# Altium PCB TG21_Slave_Device_Amply.PcbDoc
Units mm, origin at the board's own origin, x right, y up, seen from the top; angles counter-clockwise.
Board outline 90.02 x 69.98 mm, 2 copper layers (Top Layer, Bottom Layer), stack 1.571 mm thick; 72 components, 42 nets, 207 pads, 195 vias.
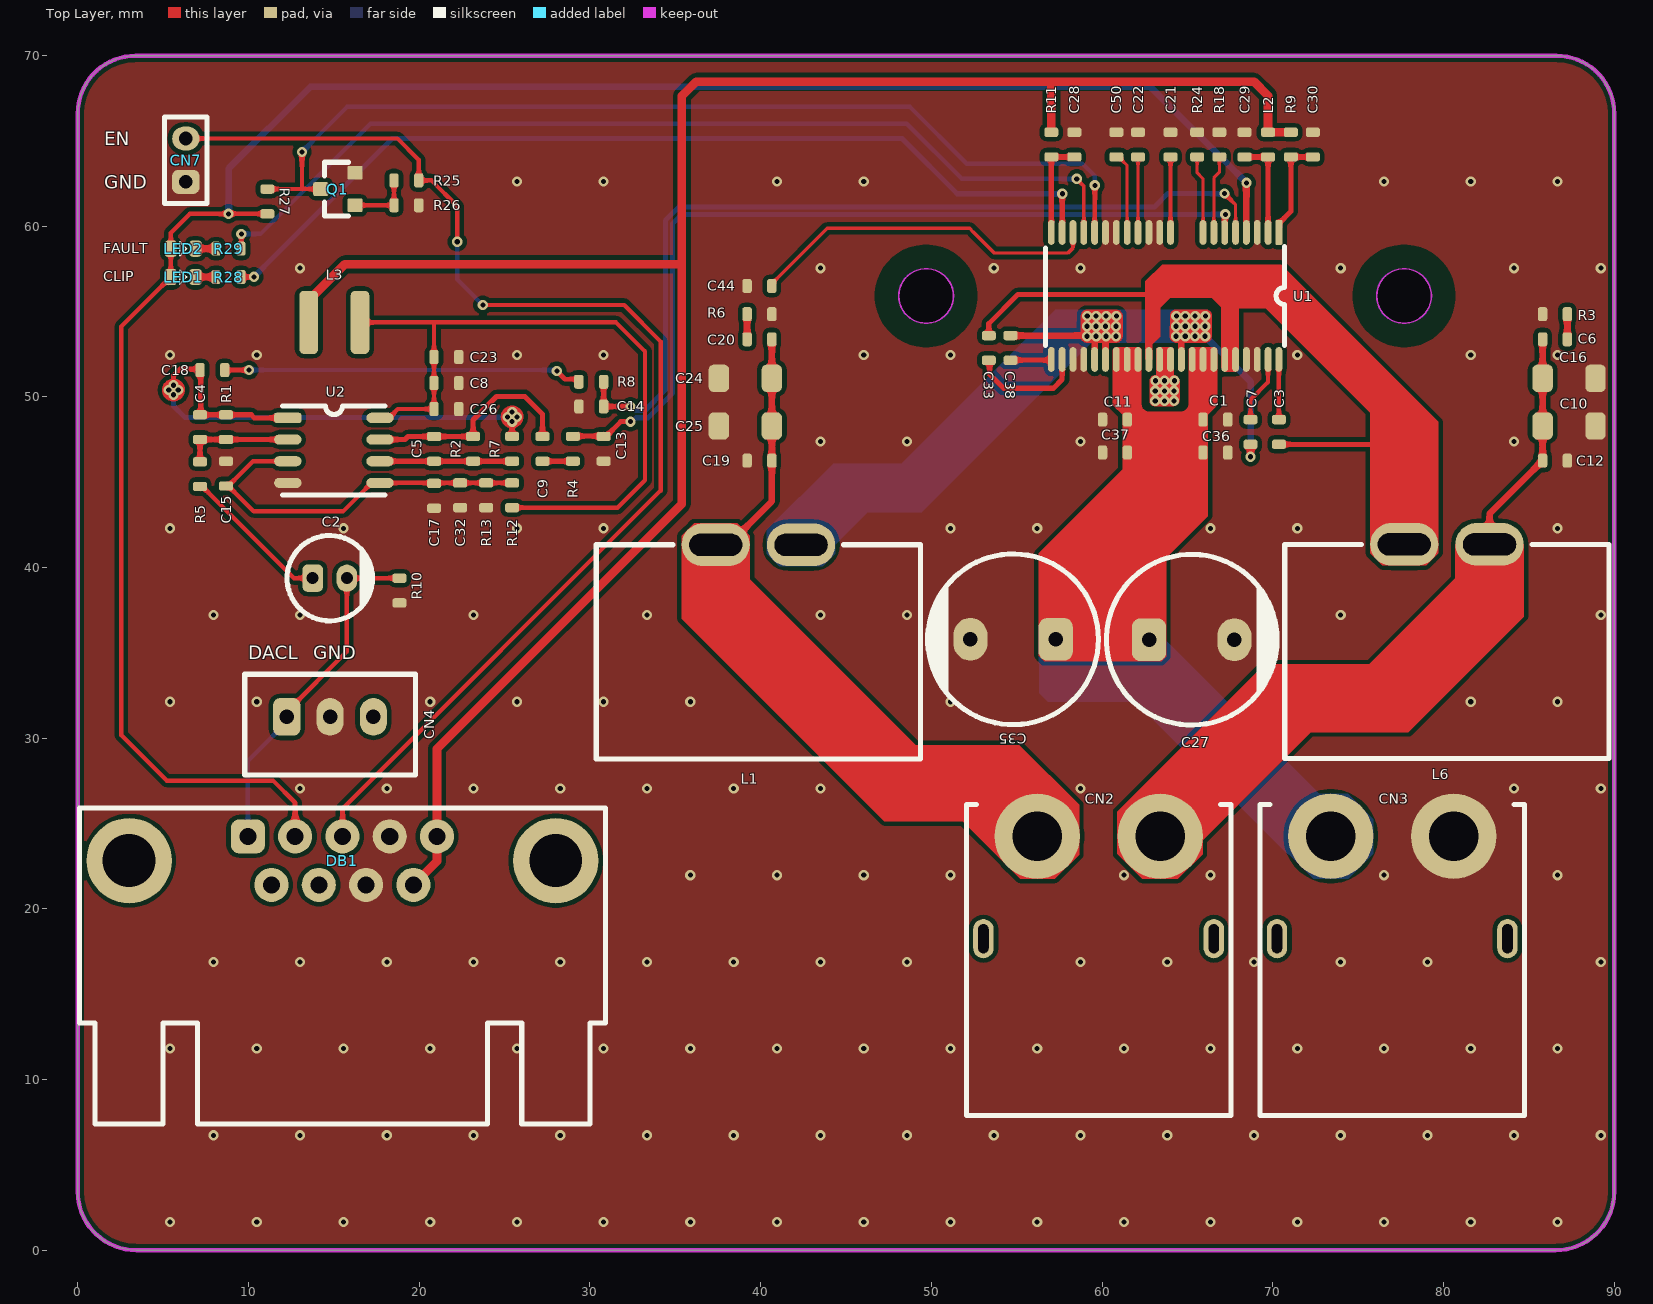
[diagram p0: Top Layer view]
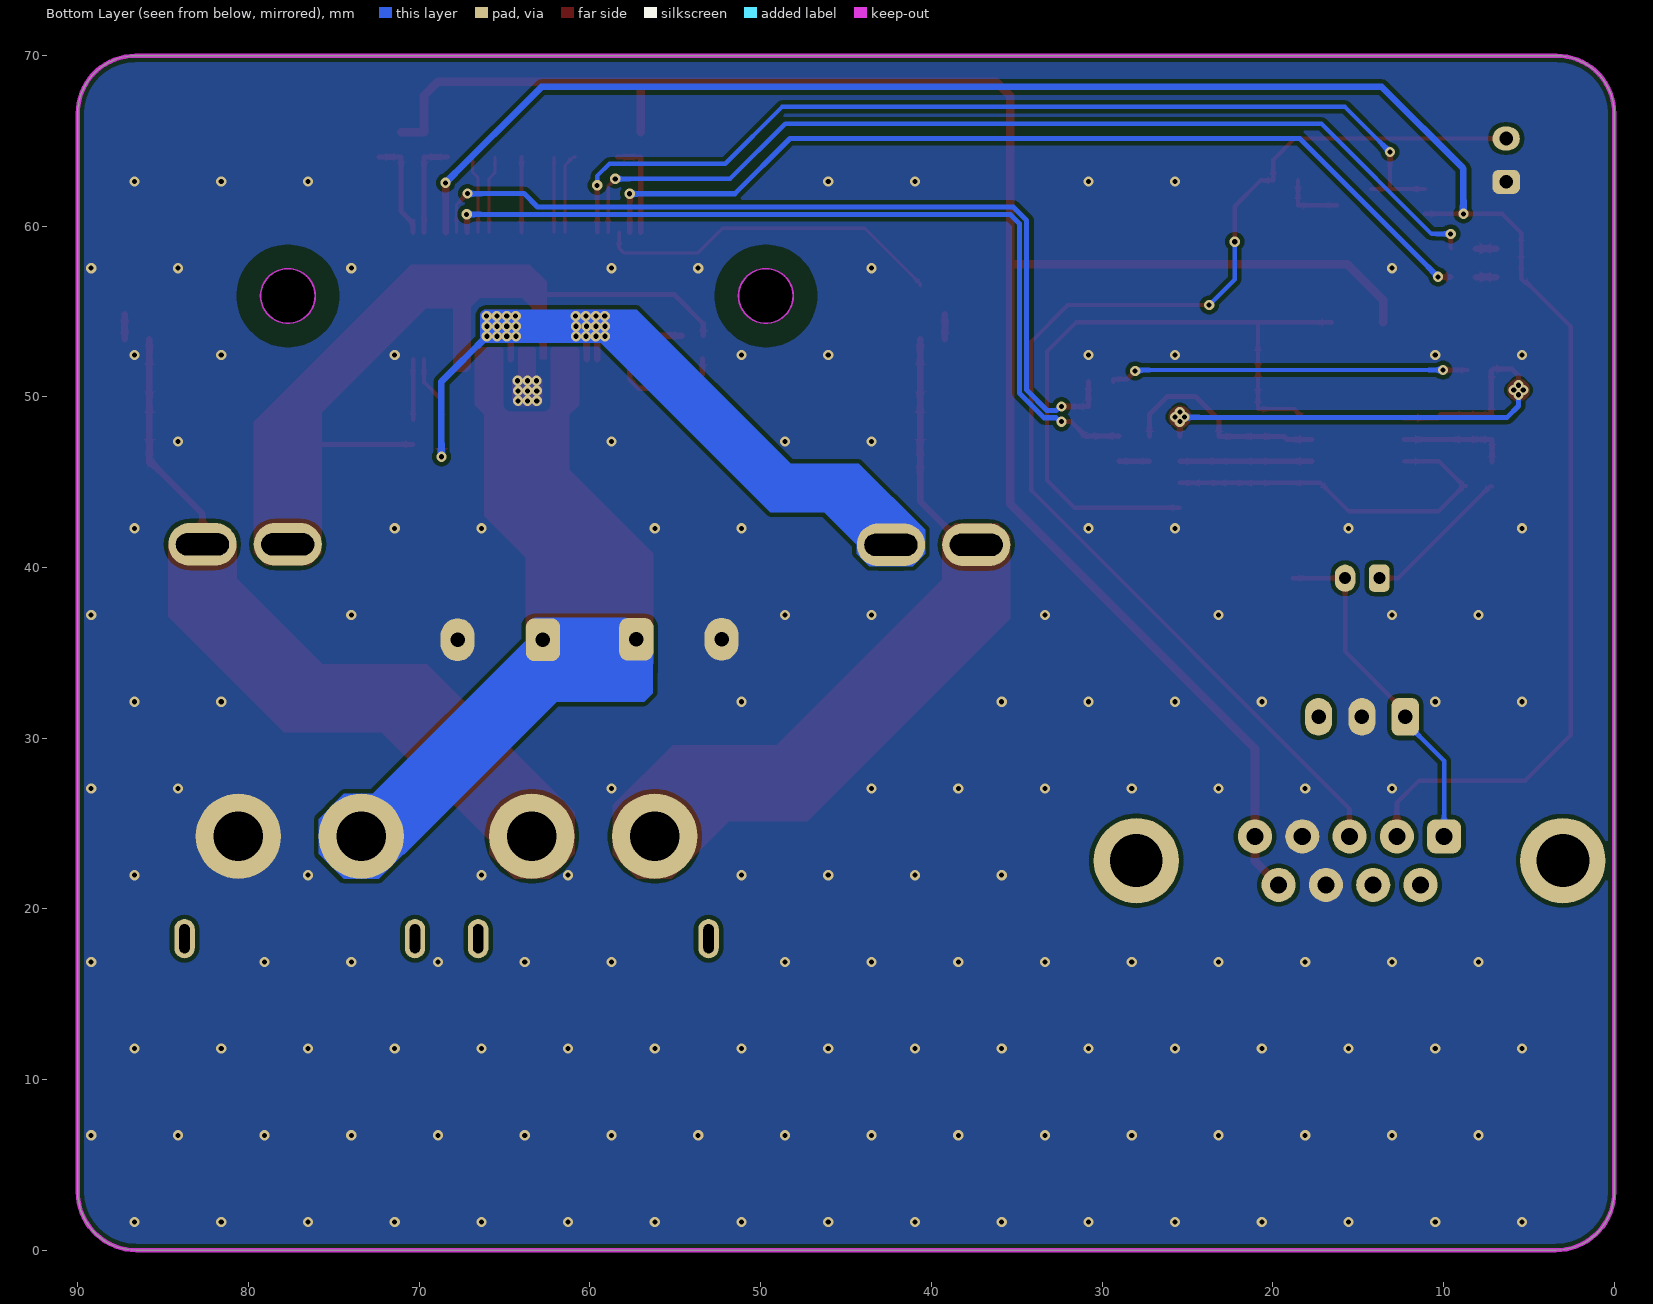
[diagram p1: Bottom Layer view, seen from below]
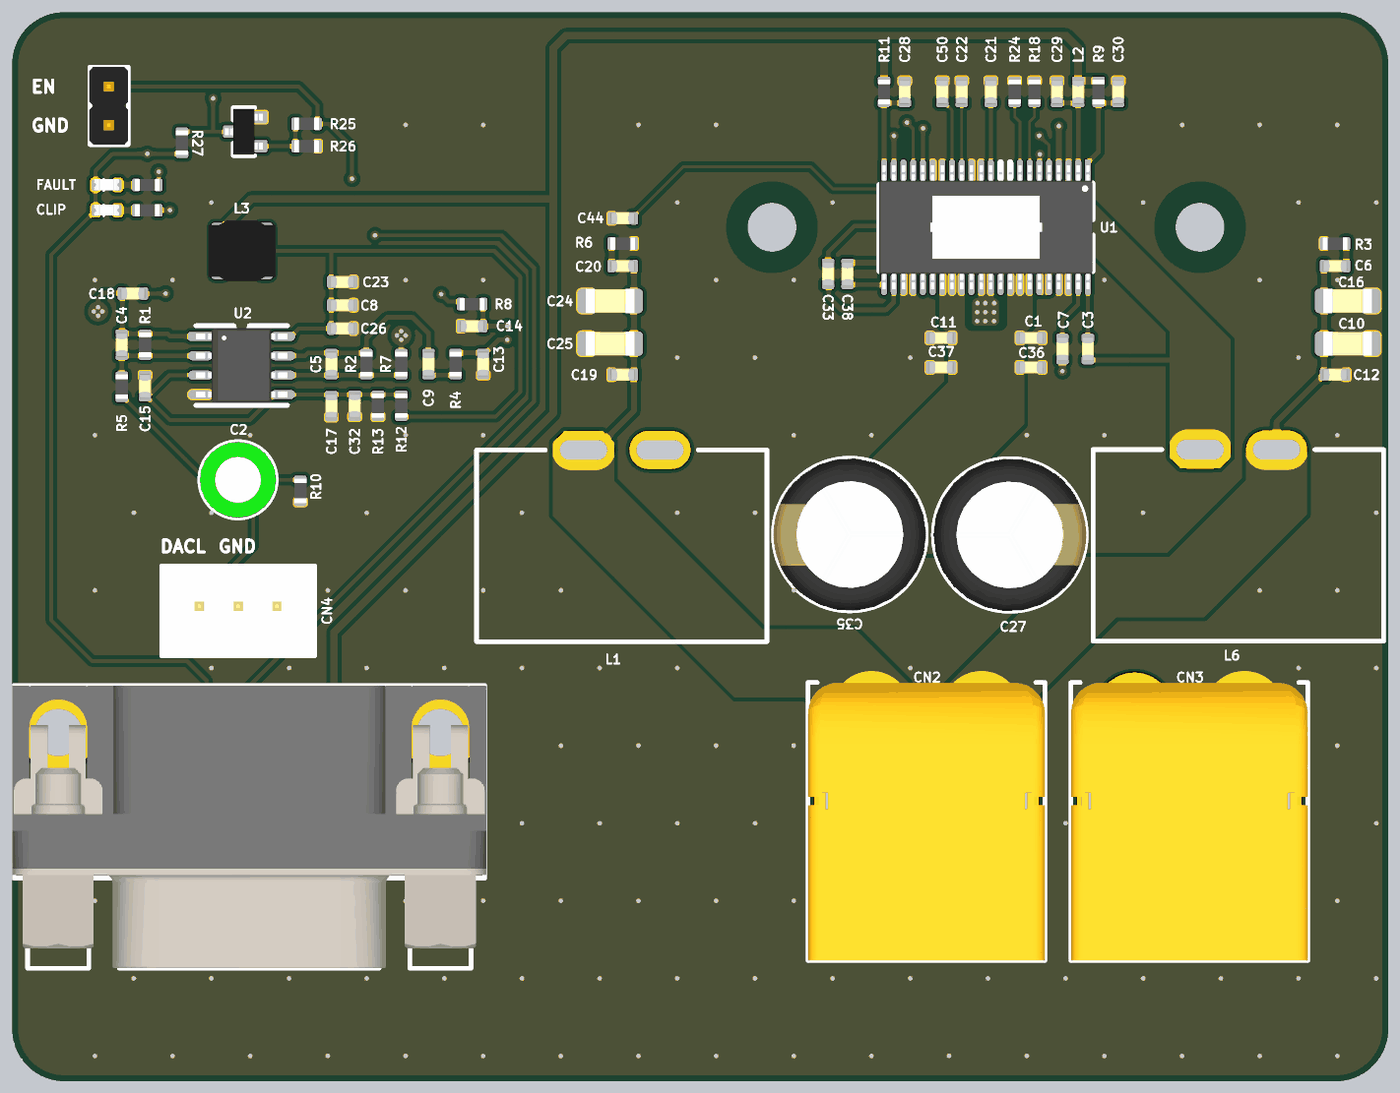
[diagram p2: 3D render of the assembled board from above, using the file's embedded part models]

## Layer stack, top to bottom
Top Solder: solder mask 0.0102, Solder Resist, Dk 3.5
Top Layer: signal copper 0.0356
Dielectric 1: dielectric 1.5, FR-4, Dk 4.8
Bottom Layer: signal copper 0.0356
Bottom Solder: solder mask 0.0102, Solder Resist, Dk 3.5

## Board outline
-0.009,3.429 -0.009,66.587 cw(c3.381,66.587) 3.381,69.977 86.619,69.977 cw(c86.619,66.587) 90.009,66.587 90.009,3.429 cw(c86.58,3.429) 86.58,0 3.42,0 cw(c3.42,3.429)
cut-out: 77.694,54.305 cw(c77.694,55.905) 76.094,55.905 cw(c77.694,55.905) 77.694,57.505 cw(c77.694,55.905) 79.294,55.905 cw(c77.694,55.905)
cut-out: 49.694,54.305 cw(c49.694,55.905) 48.094,55.905 cw(c49.694,55.905) 49.694,57.505 cw(c49.694,55.905) 51.294,55.905 cw(c49.694,55.905)

## Design rules (kind name [scope] priority, off if disabled: settings)
BoardOutlineClearance [All] p1: gap=0.2 ignorepadtopadclearanceinfootprint=FALSE
Clearance [All] p1: gap=0.25 ignorepadtopadclearanceinfootprint=FALSE
ComponentClearance [All] p1: gap=0.127 collisioncheckmode=3 verticalgap=0.127 showdistances=TRUE
DiffPairsRouting [All] p1: maxlimit=0.254 minlimit=0.127 mostfreqgap=0.127 toplayer_minwidth=0.127 toplayer_maxwidth=25.4 toplayer_prefwidth=0.127 bottomlayer_minwidth=0.127 bottomlayer_maxwidth=25.4 bottomlayer_prefwidth=0.127 maxuncoupledlength=12.7
Height [All] p1: minheight=0 maxheight=1816.048 prefheight=12.7
HoleSize [All] p1: absolutevalues=TRUE maxlimit=6.3 minlimit=0.3 maxpercent=80.000 minpercent=20.000
HoleToHoleClearance [All] p1: gap=0.025 allowstackedmicrovias=FALSE
MinimumAnnularRing [All] p1: minimumring=0.076
MinimumSolderMaskSliver [All] p1: minsoldermaskwidth=0
PlaneClearance [All] p1: clearance=0.127
PlaneConnect PlaneConnectPowerPads [InPadClass('PowerPads')] p1: planeconnectstyle=Direct reliefexpansion=0.508 reliefentries=4 reliefconductorwidth=0.254 reliefairgap=0.254
PlaneConnect [All] p2: pad.planeconnectstyle=Relief pad.reliefexpansion=0.3 pad.reliefentries=4 pad.reliefconductorwidth=0.127 pad.reliefairgap=0.127 via.planeconnectstyle=Direct via.reliefexpansion=0.3 via.reliefentries=4 via.reliefconductorwidth=0.127 via.reliefairgap=0.127
PolygonConnect PolygonConnectPowerPads [All vs (InPadClass('PowerPads'))] p1: connectstyle=Direct reliefconductorwidth=0.254 reliefentries=4 polygonreliefangle="90 Angle" airgapwidth=0.254
PolygonConnect [All] p2: connectstyle=Direct reliefconductorwidth=0.127 reliefentries=4 polygonreliefangle="90 Angle" airgapwidth=0.127
RoutingVias [All] p1: holewidth=0.3 width=0.6 viastyle="Through Hole" minholewidth=0.3 minwidth=0.6 maxholewidth=0.6 maxwidth=6.6
SilkToSilkClearance [All] p1: silktosilkclearance=0
SilkToSolderMaskClearance [IsPad] p1: minsilkscreentomaskgap=0.025 clearancetoexposedcopper=TRUE
SolderMaskExpansion [All] p1: expansion=0.075 istentingtop=FALSE
Width [All] p1: maxlimit=25.4 minlimit=0.127 preferedwidth=0.127 minimp=50.000000 maximp=50.000000 favimp=50.000000
20 further rules are at their usual default settings.

## Classes and differential pairs
differential pair IN: +IN_P -IN_N

## Components (designator, comment, footprint, x,y, rotation, side; value= is the part's Value field where it differs from the comment)
C1 "1uF" CAP-0603#1 66.642,48.66 r180 top
C2 "10uF" PLUGIN,D5xL11mm 14.758,39.37 r0 top
C3 "33nF" CAP-0603#1 70.362,47.935 r90 top
C4 "22pF" CAP-0603#1 7.154,48.216 r270 top
C5 "22pF" CAP-0603#1 20.87,46.946 r270 top
C6 "10nF" CAP-0603#1 86.533,53.365 r0 top
C7 "33nF" CAP-0603#2 68.698,47.934 r90 top
C8 "100nF" CAP-0603#1 21.588,50.8 r0 top
C9 "10uF" CAP-0603#1 27.22,46.946 r90 top
C10 "470nF" "CAP-1206 - 1" 87.358,48.285 r0 top
C11 "1uF" CAP-0603#1 60.755,48.66 r180 top
C12 "1nF" CAP-0603#1 86.533,46.253 r0 top
C13 "100pF" CAP-0603#1 30.801,46.946 r270 top
C14 "100pF" CAP-0603#1 30.076,49.428 r0 top
C15 "100nF" CAP-0603#1 8.678,45.496 r90 top
C16 "470nF" "CAP-1206 - 1" 87.358,51.079 r0 top
C17 "100nF" CAP-0603#1 20.87,44.196 r270 top
C18 "10uF" CAP-0603#1 7.879,51.562 r180 top
C19 "1nF" CAP-0603#1 39.931,46.253 r0 top
C20 "10nF" CAP-0603#1 39.931,53.365 r0 top
C21 "1uF" CAP-0603#1 64.012,64.77 r90 top
C22 "1uF" CAP-0603#1 62.107,64.77 r90 top
C23 "10uF" CAP-0603#1 21.588,52.324 r0 top
C24 "470nF" "CAP-1206 - 1" 39.106,51.079 r0 top
C25 "470nF" "CAP-1206 - 1" 39.106,48.285 r0 top
C26 "10uF" CAP-0603#1 21.588,49.276 r0 top
C27 "470uF" Plugin,D10xL20mm 65.253,35.763 r0 top
C28 "100nF" CAP-0603#1 58.379,64.77 r90 top
C29 "100nF" CAP-0603#1 68.343,64.77 r90 top
C30 "100nF" CAP-0603#1 72.349,64.77 r90 top
C32 "10uF" CAP-0603#1 22.394,44.226 r270 top
C33 "33nF" CAP-0603#2 53.365,52.857 r270 top
C35 "470uF" Plugin,D10xL20mm 54.788,35.789 r180 top
C36 "1uF" CAP-0603#1 66.642,46.728 r180 top
C37 "1uF" CAP-0603#1 60.755,46.728 r180 top
C38 "33nF" CAP-0603#1 54.635,52.857 r270 top
C44 "100nF" CAP-0603#1 39.931,56.49 r0 top
C50 "1uF" CAP-0603#1 60.837,64.77 r90 top
CN2 "XT60PW-M" XT60PW-M 59.8,18.25 r180 top locked
CN3 "XT60PW-M" XT60PW-M 77,18.25 r180 top locked
CN4 "XH2.54-3P" Plugin,P=2.54mm,3P 14.774,31.242 r0 top
CN7 "PH2.54-2P" "Plugin,P=2.54mm,2P,Pin Headers" 6.325,63.856 r90 top
DB1 "DB9_Male_RightAngle" "D-Sub, 9P, Through Hole,Right Angle" 15.5,22.82 r180 top locked
L1 "10uH" RM6 39.867,41.326 r180 top
L2 "10uH" CAP-0603#1 69.727,64.77 r270 top
L3 "10uH" SMD,4x4x1.8mm(4018) 15.028,54.356 r0 top
L6 "10uH" RM6 80.202,41.351 r180 top
LED1 "YELLOW" LED-0603 6.167,57.013 r0 top
LED2 "YELLOW" LED-0603 6.167,58.674 r0 top
Q1 "HF" SOT-23 15.148,62.165 r180 top
R1 "10K" RES-0603 8.678,48.216 r90 top
R2 "10K" RES-0603 23.156,46.946 r90 top
R3 "3R3" RES-0603 86.533,54.839 r0 top
R4 "100R" RES-0603 28.998,46.946 r90 top
R5 "10K" RES-0603 7.154,45.466 r90 top
R6 "3R3" RES-0603 39.931,54.839 r0 top
R7 "10K" RES-0603 25.442,46.946 r270 top
R8 "100R" RES-0603 30.076,50.876 r0 top
R9 "0R" RES-0603 71.06,64.77 r270 top
R10 "100K" RES-0603 18.838,38.645 r270 top
R11 "0R" RES-0603 57.027,64.77 r270 top
R12 "10K" RES-0603 25.442,44.226 r270 top
R13 "10K" RES-0603 23.918,44.226 r90 top
R18 "22K" RES-0603 66.869,64.77 r270 top
R24 "30K" RES-0603 65.574,64.77 r270 top
R25 "1K" RES-0603 19.246,62.673 r180 top
R26 "10K" RES-0603 19.246,61.215 r180 top
R27 "10K" RES-0603 11.1,61.44 r270 top
R28 "1K" RES-0603 8.828,57.013 r0 top
R29 "1K" RES-0603 8.828,58.674 r0 top
U1 "TPA3255D2" HTSSOP-44-6.1mm-TPA3255 63.694,55.905 r270 top
U2 "NE5532" SOIC-8 15,46.856 r0 top

## Footprints (in the part's own frame and the unit in brackets; to place one, negate y for a bottom-side part, rotate by r counter-clockwise, add the part's x,y. Pads: shape width x height; smd on the part's side, far side on the other; paste and mask are expansions set on the pad)
CAP-0603#1 [mm]
  rrect50% 0.55x0.82 smd: 1(-0.725,0) 2(0.725,0)
  body extent -0.8,-0.4 0.8,0.4, height 0.8
CAP-0603#2 [mm]
  rrect50% 0.55x0.82 smd paste+0: 1(-0.725,0)
  rrect50% 0.55x0.82 smd: 2(0.725,0)
  body extent -0.8,-0.4 0.8,0.4, height 0.8
"CAP-1206 - 1" [mm]
  rrect50% 1.2x1.6 smd: 1(-1.55,0) 2(1.55,0)
  body extent -1.6,-0.8 1.6,0.8, height 1.25
"D-Sub, 9P, Through Hole,Right Angle" [mm]
  rrect50% 2x2 hole 1 mask+0.2: 1(5.54,-1.42)
  round 2 hole 1 mask+0.2: 2(2.77,-1.42) 3(0,-1.42) 4(-2.77,-1.42) 5(-5.54,-1.42) 6(4.155,1.42) 7(1.385,1.42) 8(-1.385,1.42) 9(-4.155,1.42)
  round 5 hole 3.1 mask+0.2: ""(-12.495,0) ""(12.495,0)
  silkscreen extent -15.4,-3.08 15.4,15.42, body extent -15.5,-3.08 15.5,15.42, height 12.5
HTSSOP-44-6.1mm-TPA3255 [mm]
  rrect25% 1.45x0.4 smd: 1(-3.72,6.667)
  oval 1.45x0.4 smd: 2(-3.72,6.032) 3(-3.72,5.397) 4(-3.72,4.762) 5(-3.72,4.127) 6(-3.72,3.492) 7(-3.72,2.857) 8(-3.72,2.222) 11(-3.72,0.317) 12(-3.72,-0.318) 13(-3.72,-0.953) 14(-3.72,-1.588) 15(-3.72,-2.223) 16(-3.72,-2.858) 17(-3.72,-3.493) 18(-3.72,-4.128) 19(-3.72,-4.763) 20(-3.72,-5.398) 21(-3.72,-6.033) 22(-3.72,-6.667) 23(3.72,-6.667) 24(3.72,-6.032) 25(3.72,-5.397) 26(3.72,-4.762) 27(3.72,-4.127) 28(3.72,-3.492) 29(3.72,-2.857) 30(3.72,-2.222) 31(3.72,-1.587) 32(3.72,-0.952) 33(3.72,-0.317) 34(3.72,0.318) 35(3.72,0.953) 36(3.72,1.588) 37(3.72,2.223) 38(3.72,2.858) 39(3.72,3.493) 40(3.72,4.128) 41(3.72,4.763) 42(3.72,5.398) 43(3.72,6.033) 44(3.72,6.667)
  oval 1.45x0.4 on Top Overlay: 9(-3.72,1.587) 10(-3.72,0.952)
  silkscreen extent -2.9,-7 2.9,7, body extent -4.05,-7 4.05,7, height 1.2
LED-0603 [mm]
  rrect50% 0.7x0.95 smd paste-0.1: 1(-0.725,0) 2(0.725,0)
  silkscreen extent -0.2,-0.41 0.2,0.4, body extent -0.82,-0.35 0.82,0.38, height 0.68
PLUGIN,D5xL11mm [mm]
  rrect50% 1.2x1.6 hole 0.7: 1(-1,0)
  oval 1.2x1.6 hole 0.7: 2(1,0)
  silkscreen extent -2.5,-2.5 2.5,2.5, body extent -2.5,-2.5 2.5,2.5, height 12
Plugin,D10xL20mm [mm]
  rrect50% 2x2.5 hole 0.85 mask+0.2: 1(-2.5,0)
  oval 2x2.5 hole 0.85 mask+0.2: 2(2.5,0)
  silkscreen extent -5,-5 5,5, body extent -5,-5 5,5, height 20
"Plugin,P=2.54mm,2P,Pin Headers" [mm]
  rrect50% 1.4x1.6 hole 0.8: 1(-1.27,0)
  oval 1.4x1.6 hole 0.8: 2(1.27,0)
  silkscreen extent -2.54,-1.25 2.54,1.25, body extent -2.54,-1.25 2.54,1.29, height 8.89
Plugin,P=2.54mm,3P [mm]
  rrect50% 1.6x2.2 hole 0.85 mask+0.1: 1(-2.54,0)
  oval 1.6x2.2 hole 0.85 mask+0.1: 2(0,0) 3(2.54,0)
  silkscreen extent -5,-3.4 5,2.5, body extent -5.04,-3.3 5.04,2.4, height 7
RES-0603 [mm]
  rrect50% 0.55x0.82 smd: 1(-0.725,0) 2(0.725,0)
  body extent -0.8,-0.4 0.8,0.4, height 0.45
RM6 [mm]
  oval 4x2.5 hole 1.3 slot 3.1 at 0 deg: 1(-2.5,0) 2(2.5,0)
  silkscreen extent -9.5,0 9.5,12.55
SMD,4x4x1.8mm(4018) [mm]
  rrect50% 1.1x3.7 smd: 1(-1.5,0) 2(1.5,0)
  body extent -2.2,-2 2.2,2, height 1.8
SOIC-8 [mm]
  rrect50% 1.6x0.6 smd: 1(-2.7,1.905)
  oval 1.6x0.6 smd: 2(-2.7,0.635) 3(-2.7,-0.635) 4(-2.7,-1.905) 5(2.7,-1.905) 6(2.7,-0.635) 7(2.7,0.635) 8(2.7,1.905)
  silkscreen extent -3,-2.61 3,2.61, body extent -3,-2.45 3,2.45, height 1.75
SOT-23 [mm]
  rrect25% 0.9x0.8 smd: 1(-1.085,0.95) 2(-1.085,-0.95) 3(0.915,0)
  silkscreen extent -0.7,-1.57 0.7,1.57, body extent -1.25,-1.5 1.25,1.5, height 1.1
XT60PW-M [mm]
  round 5 hole 2.9 mask+0.1: 1(3.6,-6) 2(-3.6,-6)
  oval 1.2x2.3 hole 0.6 slot 1.7 at 90 deg: ""(-6.75,0) ""(6.75,0)
  silkscreen extent -7.75,-7.85 7.75,10.35, body extent -7.75,-7.85 7.75,10.35, height 8.4

## Part data
C1 C11 C21 C22 C36 C37 C50: library part CC0603KRX7R9BB105, "1uF ±10% 50V Ceramic Capacitor X7R 0603", DigiKey Part Number=311-2082-2-ND, LCSC Part #=C559769, Manufacturer=YAGEO, Package=0603, ComponentLink1Description=Link, ComponentLink1URL=https://www.lcsc.com/product-detail/C559769.html?s_z=n_CC0603KRX7R9BB105, ComponentLink2Description="Link 1", ComponentLink2URL=https://www.digikey.com/en/products/detail/yageo/CC0603KRX7R9BB105/5883796?s=N4IgTCBcDaIMJwAwDZEGYDSAlAGgdiwE4AhYgRkQFYQBdAXyA, Mfr.Part #=CC0603KRX7R9BB105
C2: library part 50YXF10MEFC5X11, "10uF 50V Aluminum Electrolytic Capacitors Through Hole,D5xL11mm 5000hrs@105℃", DigiKey Part Number=1189-1852-ND, LCSC Part #=C88726, Manufacturer=Rubycon, Package="Through Hole,D5xL11mm", ComponentLink1Description=Link, ComponentLink1URL=https://www.lcsc.com/product-detail/C88726.html, ComponentLink2Description="Link 1", ComponentLink2URL=http://digikey.com/en/products/detail/rubycon/50YXF10MEFC5X11/3562878?s=N4IgTCBcDaIKwAYCaANAYgRgQWQKJoGE4UMMQBdAXyA, Mfr.Part #=50YXF10MEFC5X11
C3 C7 C33 C38: library part CC0603KRX7R9BB333, "33nF ±10% 50V Ceramic Capacitor X7R 0603", DigiKey Part Number=311-1429-2-ND, LCSC Part #=C106856, Manufacturer=YAGEO, Package=0603, ComponentLink1Description=Link, ComponentLink1URL=https://www.lcsc.com/product-detail/C106856.html?s_z=n_CC0603KRX7R9BB333, ComponentLink2Description="Link 1", ComponentLink2URL=https://www.digikey.com/en/products/detail/yageo/CC0603KRX7R9BB333/2833594?s=N4IgTCBcDaIMJwAwDZEGYDSAlAGgdiwE4AhYtckAXQF8g, Mfr.Part #=CC0603KRX7R9BB333
C4 C5: library part CC0603JRNPO9BN220, "22pF ±5% 50V Ceramic Capacitor NP0 0603", DigiKey Part Number=311-1062-2-ND, LCSC Part #=C105620, Manufacturer=YAGEO, Package=0603, ComponentLink1Description=Link, ComponentLink1URL=https://www.lcsc.com/product-detail/C105620.html?s_z=n_CC0603JRNPO9BN220, ComponentLink2Description="Link 1", ComponentLink2URL=https://www.digikey.com/en/products/detail/yageo/CC0603JRNPO9BN220/302796?s=N4IgTCBcDaIMJwAwDZEGYBSAlAcgBQHkBOAIRzDERAF0BfIA, Mfr.Part #=CC0603JRNPO9BN220
C6 C20: library part CC0603JRX7R9BB103, "10nF ±5% 50V Ceramic Capacitor X7R 0603", DigiKey Part Number=311-1778-2-ND, LCSC Part #=C115056, Manufacturer=YAGEO, Package=0603, ComponentLink1Description=Link, ComponentLink1URL=https://www.lcsc.com/product-detail/C115056.html?s_z=n_C115056, ComponentLink2Description="Link 1", ComponentLink2URL=https://www.digikey.com/en/products/detail/yageo/CC0603JRX7R9BB103/5195187?s=N4IgTCBcDaIMJwAwDZEGYBSAlAGgdiwE4AhYgRnRAF0BfIA, Mfr.Part #=CC0603JRX7R9BB103
C8 C15 C17 C28 C29 C30 C44: library part CC0603KRX7R9BB104, "100nF ±10% 50V Ceramic Capacitor X7R 0603", DigiKey Part Number=311-1344-2-ND, LCSC Part #=C14663, Manufacturer=YAGEO, Package=0603, ComponentLink1Description=Link, ComponentLink1URL=https://www.lcsc.com/product-detail/C14663.html?s_z=n_C14663, ComponentLink2Description="Link 1", ComponentLink2URL=https://www.digikey.com/en/products/detail/yageo/CC0603KRX7R9BB104/2103082?s=N4IgTCBcDaIMwEYEFoFwCzuWZA5AIiALoC%2BQA, Mfr.Part #=CC0603KRX7R9BB104
C9 C18 C23 C26 C32: library part CL10A106MA8NRNC, "10uF ±20% 25V Ceramic Capacitor X5R 0603", DigiKey Part Number=1276-1869-2-ND, LCSC Part #=C96446, Manufacturer="Samsung Electro-Mechanics", Package=0603, ComponentLink1Description=Link, ComponentLink1URL=https://www.lcsc.com/product-detail/C96446.html?s_z=n_CL10A106MA8NRNC, ComponentLink2Description="Link 1", ComponentLink2URL=https://www.digikey.com/en/products/detail/samsung-electro-mechanics/CL10A106MA8NRNC/3887527?s=N4IgTCBcDaIMIBkCMAGAgqgbAWTQDgDkAlAuEAXQF8g, Mfr.Part #=CL10A106MA8NRNC
C10 C16 C24 C25: library part 1206B474K101NT, "470nF ±10% 100V Ceramic Capacitor X7R 1206", DigiKey Part Number=NO, LCSC Part #=C507059, Manufacturer=FH, Package=1206, ComponentLink1Description=Link, ComponentLink1URL=https://www.lcsc.com/product-detail/C507059.html, ComponentLink2Description="Link 1", Mfr.Part #=1206B474K101NT
C12 C19: library part CC0603KRX7R9BB102, "1nF ±10% 50V Ceramic Capacitor X7R 0603", DigiKey Part Number=311-1080-2-ND, LCSC Part #=C100040, Manufacturer=YAGEO, Package=0603, ComponentLink1Description=Link, ComponentLink1URL=https://www.lcsc.com/product-detail/C100040.html?s_z=n_C100040, ComponentLink2Description="Link 1", ComponentLink2URL=https://www.digikey.com/en/products/detail/yageo/CC0603KRX7R9BB102/302814?s=N4IgTCBcDaIMJwAwDZEGYDSAlAGgdiwE4AhYgRkQgF0BfIA, Mfr.Part #=CC0603KRX7R9BB102
C13 C14: library part CL10C101JB8NNNC, "100pF ±5% 50V Ceramic Capacitor C0G 0603", DigiKey Part Number=1276-1008-2-ND, LCSC Part #=C14858, Manufacturer="Samsung Electro-Mechanics", Package=0603, ComponentLink1Description=Link, ComponentLink1URL=https://www.lcsc.com/product-detail/C14858.html?s_z=n_CL10C101JBNNNC, ComponentLink2Description="Link 1", ComponentLink2URL=https://www.digikey.com/en/products/detail/samsung-electro-mechanics/CL10C101JB8NNNC/3886666?s=N4IgTCBcDaIMIBkCMAGOqkCkBCAOAcoXCALoC%2BQA, Mfr.Part #=CL10C101JB8NNNC
C27 C35: library part 50PX470MEFC10X20, "470uF 50V Aluminum Electrolytic Capacitors Through Hole,D10xL20mm 2000hrs@105℃", DigiKey Part Number=1189-4213-ND, LCSC Part #=C88733, Manufacturer=Rubycon, Package="Through Hole,D10xL20mm", ComponentLink1Description=Link, ComponentLink1URL=https://www.lcsc.com/product-detail/C88733.html, ComponentLink2Description="Link 1", ComponentLink2URL=https://www.digikey.com/en/products/detail/rubycon/50PX470MEFC10X20/3563766?s=N4IgTCBcDaIKwAYAKANALAdgQWQKIDEBhARgRTARAF0BfIA, Mfr.Part #=50PX470MEFC10X20
CN2 CN3: "Banana and Tip Connector Adapters RoHS", DigiKey Part Number=NO, LCSC Part #=C98732, Manufacturer="Changzhou Amass Elec", ComponentLink1Description=Link, ComponentLink1URL=https://www.lcsc.com/product-detail/C98732.html?s_z=n_XT60, Mfr.Part #=XT60PW-M, Package=XT60PW-M
CN4: library part BX-XH2.54-3PZZ, "Connector Header 3 position 2.5mm Pitch 3A Through Hole -25℃~+85℃", DigiKey Part Number=NO, LCSC Part #=C18077834, Manufacturer=Bossie, Package="Through Hole,P=2.5mm", ComponentLink1Description=Link, ComponentLink1URL=https://www.lcsc.com/product-detail/C18077834.html?s_z=n_BX-XH2.54-3PZZ, Mfr.Part #=BX-XH2.54-3PZZ
CN7: library part PH2.54-1X2P-H25, "Pin Header 2 Position 2.54mm Pitch Single Row Through Hole -40℃~+105℃", DigiKey Part Number=NO, LCSC Part #=C42431798, Manufacturer=JXTCONN, Package="Through Hole,P=2.54mm", ComponentLink1Description=Link, ComponentLink1URL=https://www.lcsc.com/product-detail/C42431798.html?s_z=n_2.54-1%2a2P, Mfr.Part #=PH2.54-1X2P-H25
L1 L6: library part RM6-10UH18A, "10uH SMD, 21.5x22.5mm, 5mΩ, Isat 12A", DigiKey Part Number=NO, Mfr.Part #=MTP2012S-100MC, Package="Through Hole,19x13mm", ComponentLink1Description=Link, ComponentLink1URL=https://detail.tmall.com/item.htm?abbucket=13&id=830337168403&mi_id=0000HfZtw201IDY-IbBo5SBGln4Rs-xlnrA7bLsp8-ByO4c&ns=1&priceTId=2100cff517743435818743772e0cc2&skuId=5563931960630&spm=a21n57.1.hoverItem.11&utparam=%7B%22aplus_abtest%22%3A%2250db852e2facc06d265983063d788b35%22%7D&xxc=taobaoSearch, ComponentLink2Description="Link 1", LCSC Part #=NO, Manufacturer=NO
L2: library part MLZ1608M100WT000, "250mA 10uH 90mA 1.05Ω Multilayer inductor ±20% 0603 Fixed Inductors RoHS", DigiKey Part Number=445-6389-2-ND, LCSC Part #=C76798, Manufacturer=TDK, Package=0603, ComponentLink1Description=Link, ComponentLink1URL=https://www.lcsc.com/product-detail/C76798.html, ComponentLink2Description="Link 1", ComponentLink2URL=https://www.digikey.com/en/products/detail/tdk/MLZ1608M100WT000/2465148?s=N4IgTCBcDaILIBkBaBGAbABgBxxRjA6gCr4YgC6AvkA, Mfr.Part #=MLZ1608M100WT000
L3: library part FNR4018S100MT, "1.2A 10uH Magnetic Shielded Inductor ±20% 1.6A 234mΩ SMD,4x4mm Fixed Inductors RoHS", DigiKey Part Number=NO, LCSC Part #=C167808, Manufacturer=cjiang, Package=SMD,4x4mm, Mfr.Part #=FNR4018S100MT
LED1 LED2: library part KO-0603QYGC/6, "0603 YELLOW", DigiKey Part Number=NO, Package=0603, ComponentLink1Description=Link, ComponentLink2Description="Link 1", LCSC Part #=NO, Manufacturer=NO, Mfr.Part #=KO-0603QYGC/6
Q1: library part 2SC1815, "Bipolar (BJT) Transistor NPN 50V 0.15A 80MHz 200mW Surface Mount SOT-23", DigiKey Part Number=NO, LCSC Part #=C20069143, Manufacturer=R+O, Package=SOT-23, ComponentLink1Description=Link, ComponentLink1URL=https://www.lcsc.com/product-detail/C20069143.html?s_z=n_2SC1815, Mfr.Part #=2SC1815
R1 R2 R5 R7 R12 R13 R26 R27: library part RC0603FR-0710KL, "100mW 10kΩ 75V Thick Film Resistor ±100ppm/℃ ±1% 0603 Chip Resistor - Surface Mount RoHS", DigiKey Part Number=311-10.0KHRTR-ND, LCSC Part #=C98220, Manufacturer=YAGEO, Package=0603, ComponentLink1Description=Link, ComponentLink1URL=https://www.lcsc.com/product-detail/C98220.html?s_z=n_C98220, ComponentLink2Description="Link 1", ComponentLink2URL=https://www.digikey.com/en/products/detail/yageo/RC0603FR-0710KL/726880?s=N4IgTCBcDaIMwEYEFoEAYB0aDSAJASgCr7IByAIiALoC%2BQA, Mfr.Part #=RC0603FR-0710KL
R3 R6: library part RC0603FR-073R3L, "100mW 3.3Ω 75V Thick Film Resistor ±1% ±200ppm/℃ 0603 Chip Resistor - Surface Mount RoHS", DigiKey Part Number=13-RC0603FR-073R3LTR-ND, LCSC Part #=C137725, Manufacturer=YAGEO, Package=0603, ComponentLink1Description=Link, ComponentLink1URL=https://www.lcsc.com/product-detail/C137725.html?s_z=n_RC0603FR-073R3L, ComponentLink2Description="Link 1", ComponentLink2URL=https://www.digikey.com/en/products/detail/yageo/RC0603FR-073R3L/5918348?s=N4IgTCBcDaIEoGEAMA2JBmAYnAtEg7OnOgDIgC6AvkA, Mfr.Part #=RC0603FR-073R3L
R4 R8: library part RC0603FR-07100RL, "100mW 100Ω 75V Thick Film Resistor ±100ppm/℃ ±1% 0603 Chip Resistor - Surface Mount RoHS", DigiKey Part Number=311-100HRTR-ND, LCSC Part #=C105588, Manufacturer=YAGEO, Mfr.Part #=RC0603FR-07100KL, Package=0603, ComponentLink1Description=Link, ComponentLink1URL=https://www.lcsc.com/product-detail/C105588.html?s_z=n_RC0603FR-07100RL, ComponentLink2Description="Link 1", ComponentLink2URL=https://www.digikey.com/en/products/detail/yageo/RC0603FR-07100RL/726888?s=N4IgTCBcDaIEoGEAMA2JBmAYnAtEg7AIxJJwAyIAugL5A
R9 R11: library part RC0603FR-070RL, "0Ω 100mW 75V Thick Film Resistor ±1% 0603 Chip Resistor - Surface Mount RoHS", DigiKey Part Number=311-0.0HRTR-ND, LCSC Part #=C100044, Manufacturer=YAGEO, Package=0603, ComponentLink1Description=Link, ComponentLink1URL=https://www.lcsc.com/product-detail/C100044.html?s_z=n_0R, ComponentLink2Description="Link 1", ComponentLink2URL=https://www.digikey.com/en/products/detail/yageo/RC0603FR-070RL/1304008?s=N4IgTCBcDaIEoGEAMA2JBmAYnAtEg7EnADIgC6AvkA, Mfr.Part #=RC0603FR-070RL
R10: library part RC0603FR-07100KL, "100mW 100kΩ 75V Thick Film Resistor ±100ppm/℃ ±1% 0603 Chip Resistor - Surface Mount RoHS", DigiKey Part Number=311-100KHRTR-ND, LCSC Part #=C14675, Manufacturer=YAGEO, Package=0603, ComponentLink1Description=Link, ComponentLink1URL=https://www.lcsc.com/product-detail/C14675.html?s_z=n_RC0603FR-07100KL, ComponentLink2Description="Link 1", ComponentLink2URL=https://www.digikey.com/en/products/detail/yageo/RC0603FR-07100KL/726889?s=N4IgTCBcDaIEoGEAMA2JBmAYnAtEg7AIxJIDSAMiALoC%2BQA, Mfr.Part #=RC0603FR-07100KL
R18: library part RC0603FR-0722KL, "100mW 22kΩ 75V Thick Film Resistor ±100ppm/℃ ±1% 0603 Chip Resistor - Surface Mount RoHS", DigiKey Part Number=311-22.0KHRTR-ND, LCSC Part #=C114065, Manufacturer=YAGEO, Package=0603, ComponentLink1Description=Link, ComponentLink1URL=https://www.lcsc.com/product-detail/C114065.html?s_z=n_22K, ComponentLink2Description="Link 1", ComponentLink2URL=https://www.digikey.com/en/products/detail/yageo/RC0603FR-0722KL/727056?s=N4IgTCBcDaIEoGEAMA2JBmAYnAtEg7GGANIAyIAugL5A, Mfr.Part #=RC0603FR-0722KL
R24: library part RC0603FR-0730KL, "100mW 30kΩ 75V Thick Film Resistor ±100ppm/℃ ±1% 0603 Chip Resistor - Surface Mount RoHS", DigiKey Part Number=311-30.0KHRTR-ND, LCSC Part #=C100001, Manufacturer=YAGEO, Package=0603, ComponentLink1Description=Link, ComponentLink1URL=https://www.lcsc.com/product-detail/C100001.html?s_z=n_30K, ComponentLink2Description="Link 1", ComponentLink2URL=https://www.digikey.com/en/products/detail/yageo/RC0603FR-0730KL/727140?s=N4IgTCBcDaIEoGEAMA2JBmAYnAtEg7OkgNIAyIAugL5A, Mfr.Part #=RC0603FR-0730KL
R25 R28 R29: library part RC0603FR-071KL, "100mW 1kΩ 75V Thick Film Resistor ±100ppm/℃ ±1% 0603 Chip Resistor - Surface Mount RoHS", DigiKey Part Number=311-1.00KHRTR-ND, LCSC Part #=C22548, Manufacturer=YAGEO, Package=0603, ComponentLink1Description=Link, ComponentLink1URL=https://www.lcsc.com/product-detail/C22548.html?s_z=n_C22548, ComponentLink2Description="Link 1", ComponentLink2URL=https://www.digikey.com/en/products/detail/yageo/RC0603FR-071KL/726843?s=N4IgTCBcDaIEoGEAMA2JBmAYnAtEg7AIwDSAMiALoC%2BQA, Mfr.Part #=RC0603FR-071KL
U1: library part TPA3255

## Via types
v1: diameter 0.6, hole 0.3, Top Layer to Bottom Layer, tented both sides, 195 vias

## Nets (pads, with @x,y where several pads share a name; then routed paths per layer and width w, separated by ;. In a path a pad name is that pad's centre, name@x,y a point inside that pad or via, vN(x,y) a via of type N, cw(c..) or ccw(c..) an arc to the next point about the centre after c; other vN are vias at no path point)
3.3V: DB1.2 LED1.1 LED2.1 R27.2 U1.4 | length 120.1
  Top Layer w0.254: R27.2 v1(8.831,60.715) 6.563,60.715 5.442,59.594 LED2.1 5.442,56.914 5.222,56.694 5.123,56.694 2.54,54.111 2.54,30.175 5.207,27.508 11.43,27.508 12.73,26.208 DB1.2
  Top Layer w0.381: U1.4 68.457,62.497 68.47,62.509 68.47,62.519 v1(68.458,62.53)
  Bottom Layer w0.381: v1(8.831,60.715) 8.831,63.365 13.614,68.148 62.84,68.148 v1(68.458,62.53)
6V-VREF: C15.1 C17.1 C32.1 R12.1 R13.2 U2.3 U2.5 | length 22.2
  Top Layer w0.254: C15.1 C15.1@8.813,44.771 ; U2.3 10.263,46.221 C15.1@8.813,44.771 ; R12.1 R13.2 C32.1 U2.5 17.2,44.951 15.531,43.282 10.302,43.282 C15.1@8.813,44.771
12V: DB1.5 DB1.9 L2.1 L3.1 R9.1 R11.1 | length 118.3
  Top Layer w0.508: L3.1@13.546,54.392 13.555,54.383 L3.1 13.528,55.656 15.632,57.76 35.357,57.76 35.382,57.785 ; DB1.9 20.75,22.495 21.038,22.783 21.038,24.238 DB1.5 21.04,29.371 35.382,43.713 35.382,57.785 ; R11.1 57.027,68.451 ; L2.1@69.765,65.516 L2.1@69.744,65.495 ; R9.1 L2.1@69.744,65.495 ; 35.382,57.785 35.382,67.615 36.218,68.451 68.912,68.451 69.727,67.636 L2.1 L2.1@69.744,65.495
12V-OP: C8.1 C23.1 C26.1 L3.2 R12.2 U2.8 | length 41.9
  Top Layer w0.254: L3.2 20.87,54.356 ; U2.8 18.231,48.761 18.746,49.276 C26.1 C8.1 C23.1 20.863,54.349 20.87,54.356 ; R12.2 31.614,43.501 33.223,45.11 33.223,52.654 31.521,54.356 20.87,54.356
CLIP: R28.2 U1.21 | length 55.1
  Top Layer w0.3: R28.2 10.15,57.013 10.16,57.023 v1(10.312,57.023) ; U1.21 57.668,59.632 57.668,61.881 v1(57.675,61.888)
  Bottom Layer w0.3: v1(10.312,57.023) 18.415,65.126 48.277,65.126 51.514,61.888 v1(57.675,61.888)
DAC_L: C2.2 CN4.1 DB1.1 R10.1 | length 20.6
  Top Layer w0.254: CN4.1 12.234,31.542 15.758,35.066 C2.2 R10.1
  Bottom Layer w0.254: DB1.1 9.96,28.668 12.234,30.942 CN4.1
EN: CN7.2 DB1.3 R25.1 | length 72.7
  Top Layer w0.254: CN7.2 18.72,65.126 19.971,63.874 R25.1 20.715,62.673 22.225,61.163 v1(22.225,59.08) ; DB1.3 15.5,25.863 34.138,44.501 34.138,53.238 32.004,55.372 v1(23.724,55.372)
  Bottom Layer w0.254: v1(22.225,59.08) 22.225,56.871 v1(23.724,55.372)
FAULT: R29.2 U1.19 | length 57.1
  Top Layer w0.2: R29.2 9.581,58.702 9.581,59.5 9.576,59.504 v1(9.576,59.538) ; v1(58.522,62.763) 58.522,62.748 58.938,62.332 58.938,59.632 U1.19
  Bottom Layer w0.254: v1(9.576,59.538) 10.693,59.538 17.145,65.989 48.565,65.989 51.791,62.763 v1(58.522,62.763)
GND: C1.1 C8.2 C10.2 C11.2 C12.2 C13.2 C14.1 C15.2 C16.2 C17.2 C19.1 C21.2 C22.2 C23.2 C24.1 C25.1 C26.2 C27.2 C28.2 C29.2 C30.2 C32.2 C35.2 C36.1 C37.2 C44.1 C50.2 CN3.2 CN4.2 CN7.1 DB1.4 DB1.8 Q1.2 R3.1 R6.2 R10.2 R13.1 R18.1 R24.1 R26.1 U1.3 U1.12 U1.13 U1.16 U1.17 U1.25 U1.26 U1.33 U1.34 U1.41 U1.42 U2.4
  other v1: 5.4,1.65 10.48,1.65 15.56,1.65 20.64,1.65 25.72,1.65 30.8,1.65 35.88,1.65 40.96,1.65 46.04,1.65 51.12,1.65 56.2,1.65 61.28,1.65 66.36,1.65 71.44,1.65 76.52,1.65 81.6,1.65 86.68,1.65 7.94,6.73 13.02,6.73 18.1,6.73 23.18,6.73 28.26,6.73 33.34,6.73 38.42,6.73 43.5,6.73 48.58,6.73 53.66,6.73 58.74,6.73 63.82,6.73 68.9,6.73 73.98,6.73 79.06,6.73 84.14,6.73 89.22,6.73 5.4,11.81 10.48,11.81 15.56,11.81 20.64,11.81 25.72,11.81 30.8,11.81 35.88,11.81 40.96,11.81 46.04,11.81 51.12,11.81 56.2,11.81 61.28,11.81 66.36,11.81 71.44,11.81 76.52,11.81 81.6,11.81 86.68,11.81 7.94,16.89 13.02,16.89 18.1,16.89 23.18,16.89 28.26,16.89 33.34,16.89 38.42,16.89 43.5,16.89 48.58,16.89 58.74,16.89 63.82,16.89 68.9,16.89 73.98,16.89 79.06,16.89 89.22,16.89 35.88,21.97 40.96,21.97 46.04,21.97 51.12,21.97 61.28,21.97 66.36,21.97 76.52,21.97 86.68,21.97 13.02,27.05 18.1,27.05 23.18,27.05 28.26,27.05 33.34,27.05 38.42,27.05 43.5,27.05 58.74,27.05 84.14,27.05 89.22,27.05 5.4,32.13 10.48,32.13 20.64,32.13 25.72,32.13 30.8,32.13 35.88,32.13 51.12,32.13 81.6,32.13 86.68,32.13 7.94,37.21 13.02,37.21 23.18,37.21 33.34,37.21 43.5,37.21 48.58,37.21 73.98,37.21 89.22,37.21 5.4,42.29 15.56,42.29 25.72,42.29 30.8,42.29 51.12,42.29 56.2,42.29 66.36,42.29 71.44,42.29 86.68,42.29 43.5,47.37 48.58,47.37 58.74,47.37 84.14,47.37 63.118,49.759 63.652,49.759 64.223,49.759 63.118,50.343 63.652,50.343 64.223,50.343 63.131,50.939 63.652,50.939 64.236,50.939 5.4,52.45 10.48,52.45 25.72,52.45 30.8,52.45 46.04,52.45 51.12,52.45 71.44,52.45 81.6,52.45 86.68,52.45 13.02,57.53 43.5,57.53 53.66,57.53 58.74,57.53 73.98,57.53 84.14,57.53 89.22,57.53 25.72,62.61 30.8,62.61 40.96,62.61 46.04,62.61 76.52,62.61 81.6,62.61 86.68,62.61
IN_N: C13.1 R4.2 U1.6 | length 50.5
  Top Layer w0.3: R4.2 29.02,47.693 C13.1@30.754,47.693 ; C13.1 30.936,47.671 31.805,48.539 v1(32.376,48.539) ; U1.6 67.204,59.643 67.204,60.664 v1(67.223,60.683)
  Bottom Layer w0.3: v1(32.376,48.539) 32.457,48.539 32.688,48.77 33.398,48.77 33.648,49.021 34.844,50.217 34.844,60.148 35.379,60.683 v1(67.223,60.683)
IN_P: C14.2 R8.2 U1.5 | length 51.5
  Top Layer w0.178: v1(67.174,61.9) 67.822,61.252 U1.5
  Top Layer w0.3: R8.2 C14.2 v1(32.376,49.428)
  Bottom Layer w0.3: v1(32.376,49.428) 32.457,49.428 32.688,49.197 33.221,49.197 34.417,50.394 34.417,60.325 35.202,61.11 63.066,61.11 63.856,61.9 v1(67.174,61.9)
NetC2_1: C2.1 R5.1 | length 8.8
  Top Layer w0.254: R5.1 7.289,44.741 12.66,39.37 C2.1
NetC3_1: C3.1 C33.1 L6.2 U1.32 U1.39 U1.40 | length 18.3
  Top Layer w0.3: C33.1 53.365,54.28 55.067,55.982 62.814,55.982 62.89,55.905 ; C3.1 77.613,47.21 77.648,47.244
NetC3_2: C3.2 U1.44 | length 3.5
  Top Layer w0.254: C3.2 U1.44
NetC4_1: C4.1 C18.2 R1.2 R7.1 U2.1 | length 32.4
  Top Layer w0.3: v1(5.605,50.114) 5.605,51.232 5.986,51.613 7.103,51.613 C18.2 ; C18.2@7.202,51.514 7.202,48.988 C4.1 R1.2 10.156,48.941 10.336,48.761 U2.1 ; R7.1 v1(25.442,48.539)
  Bottom Layer w0.3: v1(5.605,50.114) 5.605,49.454 6.265,48.793 25.188,48.793 v1(25.442,48.539)
  other v1: 25.163,48.819 25.721,48.819 25.442,49.098 5.325,50.394 5.884,50.394 5.605,50.673
NetC4_2: C4.2 R1.1 R5.2 U2.2 | length 6.4
  Top Layer w0.3: R5.2 C4.2 R1.1 U2.2
NetC5_1: C5.1 C9.2 R2.2 U2.7 | length 12.9
  Top Layer w0.3: U2.7 19.161,47.491 19.341,47.671 C5.1 R2.2 23.156,48.641 24.528,50.013 26.179,50.013 27.22,48.971 C9.2
NetC5_2: C5.2 R2.1 R7.2 U2.6 | length 7.7
  Top Layer w0.3: U2.6 C5.2 R2.1 R7.2
NetC6_1: C6.1 C10.1 C12.1 C16.1 CN2.2 L6.1 | length 13.4
  Top Layer w0.381: L6.1 82.702,43.148 85.589,46.034 85.724,46.034 85.808,46.118 C12.1 C10.1 C16.1 C6.1
NetC6_2: C6.2 R3.2 | length 1.5
  Top Layer w0.381: C6.2 R3.2
NetC7_1: C7.1 C38.1 L1.1 U1.27 U1.28 U1.35 | length 18.2
  Top Layer w0.381: C38.1 59.083,53.582 v1(59.122,53.543) ; U1.27 59.567,53.394 59.657,53.484 v1(59.657,53.543) ; U1.28 v1(60.202,54.127) ; U1.35 64.651,52.189 64.651,53.262 64.873,53.484 v1(64.873,53.543) ; v1(68.698,46.482) C7.1
  Bottom Layer w0.381: v1(66.04,53.543) 68.698,50.885 v1(68.698,46.482)
  other v1: 60.227,53.543 60.824,53.543 64.338,53.543 65.443,53.543 59.122,54.127 59.657,54.127 60.824,54.127 64.338,54.127 64.873,54.127 65.443,54.127 66.04,54.127 59.135,54.723 59.657,54.723 60.24,54.723 60.837,54.723 64.351,54.723 64.873,54.723 65.456,54.723 66.053,54.723
NetC7_2: C7.2 U1.43 | length 4
  Top Layer w0.254: C7.2 68.698,49.826 69.727,50.855 U1.43
NetC9_1: C9.1 R4.1 | length 1.8
  Top Layer w0.3: C9.1 R4.1
NetC18_1: C18.1 R8.1 | length 21.1
  Top Layer w0.254: C18.1 v1(10.024,51.562) ; v1(28.058,51.511) 28.537,51.032 29.33,51.032 29.351,51.011 R8.1
  Bottom Layer w0.254: v1(10.024,51.562) 28.007,51.562 v1(28.058,51.511)
NetC19_2: C19.2 C20.2 C24.2 C25.2 CN2.1 L1.2 | length 13.8
  Top Layer w0.381: L1.2 38.117,41.326 40.656,43.864 C19.2 C25.2 C24.2 C20.2
NetC20_1: C20.1 R6.1 | length 1.5
  Top Layer w0.381: C20.1 R6.1
NetC21_1: C21.1 U1.11 | length 4.4
  Top Layer w0.25: U1.11 C21.1
NetC22_1: C22.1 U1.14 | length 4.4
  Top Layer w0.178: U1.14 C22.1
NetC28_1: C28.1 R11.2 U1.22 | length 5.8
  Top Layer w0.3: U1.22 R11.2 C28.1
NetC29_1: C29.1 L2.2 U1.2 | length 5.8
  Top Layer w0.3: C29.1 L2.2 U1.2
NetC30_1: C30.1 R9.2 U1.1 | length 6
  Top Layer w0.3: U1.1 70.362,60.15 71.06,60.849 R9.2 C30.1
NetC33_2: C33.2 U1.24 | length 6.9
  Top Layer w0.3: C33.2@53.41,52.222 53.41,51.314 54.229,50.495 57.15,50.495 57.662,51.007 U1.24
NetC38_2: C38.2 U1.23 | length 2.4
  Top Layer w0.3: C38.2@54.635,52.144 56.986,52.144 U1.23
NetC50_1: C50.1 U1.15 | length 4.8
  Top Layer w0.178: C50.1 60.972,64.045 61.472,63.545 U1.15
NetLED1_2: LED1.2 R28.1 | length 1.2
  Top Layer w0.381: LED1.2 R28.1
NetLED2_2: LED2.2 R29.1 | length 1.2
  Top Layer w0.381: LED2.2 R29.1
NetQ1_1: Q1.1 R25.2 R26.2 | length 3.7
  Top Layer w0.254: Q1.1 R26.2 R25.2
NetR18_2: R18.2 U1.7 | length 4.6
  Top Layer w0.178: U1.7 66.552,62.827 66.869,63.144 R18.2
NetR24_2: R24.2 U1.8 | length 4.6
  Top Layer w0.178: R24.2 65.574,63.119 65.917,62.776 U1.8
RESET: Q1.3 R27.1 U1.18 | length 57.8
  Top Layer w0.25: R27.1 13.17,62.165 ; v1(13.132,64.338) 13.132,62.204 13.17,62.165 ; Q1.3 13.17,62.165 ; U1.18 59.567,61.514 59.58,61.527 v1(59.58,62.382)
  Bottom Layer w0.25: v1(13.132,64.338) 15.773,66.98 48.743,66.98 52.07,63.652 58.852,63.652 59.58,62.925 v1(59.58,62.382)
VBAT: C1.2 C11.1 C27.1 C35.1 C36.2 C37.1 CN3.1 U1.29 U1.30 U1.31 U1.36 U1.37 U1.38
VBG: C44.2 U1.20 | length 20.8
  Top Layer w0.2: C44.2 40.656,56.625 43.899,59.868 52.239,59.868 52.459,59.648
  Top Layer w0.203: 52.459,59.648 53.687,58.42 58.005,58.42 58.297,58.712 U1.20
pads on no net: CN2. CN3. CN4.3 DB1. DB1.6 DB1.7 U1.9 U1.10

## Polygon pours and split planes (outlines as drawn)
GND on Bottom Layer "NONET_L-01_P-001" (solid, pour order 2): -0.009,3.429 -0.009,66.587 cw(c3.381,66.587) 3.381,69.977 86.619,69.977 cw(c86.619,66.587) 90.009,66.587 90.009,3.429 cw(c86.58,3.429) 86.58,0 3.42,0 cw(c3.42,3.429)
GND on Top Layer "NONET_L-01_P-001" (solid, pour order 0): -0.009,3.429 -0.009,66.587 cw(c3.381,66.587) 3.381,69.977 86.619,69.977 cw(c86.619,66.587) 90.009,66.587 90.009,3.429 cw(c86.58,3.429) 86.58,0 3.42,0 cw(c3.42,3.429)

## Keep-outs
Keep-Out Layer:
  circle w0.102: c77.694,55.905 r1.6
  circle w0.102: c49.694,55.905 r1.6
  lines w0.254: -0.009,3.429 ccw(c3.42,3.429) 3.42,0 86.58,0 ccw(c86.58,3.429) 90.009,3.429 90.009,66.587 ccw(c86.619,66.587) 86.619,69.977 3.381,69.977 ccw(c3.381,66.587) -0.009,66.587 -0.009,3.429

## Other copper
Top Layer:
  region net GND: 62.789,50.927 cw(c63.119,50.927) 63.119,51.257 64.211,51.257 cw(c64.211,50.927) 64.541,50.927 64.541,49.784 cw(c64.211,49.784) 64.211,49.454 63.068,49.454 cw(c63.068,49.733) 62.789,49.733
  region net GND: 63.377,52.91 64.012,52.91 cw(c64.012,52.71) 64.212,52.71 64.212,51.131 cw(c63.983,51.131) 63.983,50.902 63.348,50.902 cw(c63.348,51.072) 63.177,51.072 63.177,52.71 cw(c63.377,52.71)
  region net NetC3_1: 64.187,57.388 64.187,57.413 cw(c64.517,57.413) 64.517,57.743 66.269,57.743 cw(c66.269,57.388) 66.625,57.388 66.625,56.194 cw(c66.244,56.194) 66.244,55.813 64.542,55.813 cw(c64.542,56.194) 64.161,56.194
  region net NetC7_1: 63.992,54.746 63.992,54.772 cw(c64.322,54.772) 64.322,55.102 66.075,55.102 cw(c66.075,54.746) 66.431,54.746 66.431,53.552 cw(c66.05,53.552) 66.05,53.171 64.348,53.171 cw(c64.348,53.552) 63.967,53.552
  pour cut-out: 77.694,52.905 cw(c77.694,55.905) 74.694,55.905 cw(c77.694,55.905) 77.694,58.905 cw(c77.694,55.905) 80.694,55.905 cw(c77.694,55.905)
  pour cut-out: 49.694,52.905 cw(c49.694,55.905) 46.694,55.905 cw(c49.694,55.905) 49.694,58.905 cw(c49.694,55.905) 52.694,55.905 cw(c49.694,55.905)
  region net NetC3_1: 64.177,57.379 64.177,57.404 cw(c64.507,57.404) 64.507,57.734 66.26,57.734 cw(c66.26,57.379) 66.615,57.379 66.615,56.185 cw(c66.234,56.185) 66.234,55.804 64.533,55.804 cw(c64.533,56.185) 64.152,56.185
  region net NetC4_1: 5.605,51.05 cw(c5.605,50.389) 6.265,50.415 cw(c5.592,50.402) 5.605,49.729 cw(c5.605,50.389) 4.944,50.389 cw(c5.605,50.389)
  region net NetC4_1: 25.442,49.475 cw(c25.442,48.814) 26.102,48.84 cw(c25.429,48.827) 25.442,48.154 cw(c25.442,48.814) 24.782,48.814 cw(c25.442,48.814)
  region net NetC7_1: 58.767,54.737 58.767,54.762 cw(c59.097,54.762) 59.097,55.093 60.85,55.093 cw(c60.85,54.737) 61.205,54.737 61.205,53.543 cw(c60.824,53.543) 60.824,53.162 59.122,53.162 cw(c59.122,53.543) 58.741,53.543
  region net NetC3_1: 66.645,56.312 cw(c67.306,56.312) 67.28,56.972 cw(c67.293,56.299) 67.966,56.312 cw(c67.306,56.312) 67.306,55.652 cw(c67.306,56.312)
  region net VBAT: 60.637,52.71 cw(c60.837,52.71) 60.837,52.91 62.107,52.91 cw(c62.107,52.71) 62.307,52.71 62.307,49.571 ccw(c62.755,49.571) 62.755,49.124 64.565,49.124 ccw(c64.565,49.659) 65.082,49.52 65.082,51.663 65.082,52.71 cw(c65.282,52.71) 65.282,52.91 66.552,52.91 cw(c66.552,52.71) 66.752,52.71 66.752,49.492 66.192,48.932 66.192,46.455 cw(c66.054,46.455) 66.054,46.318 61.348,46.318 cw(c61.348,46.438) 61.228,46.438 61.228,46.455 61.205,46.455 61.205,48.932 60.637,49.5 60.637,51.66
  region net NetC6_1: 60.9,23.214 62.364,21.75 64.436,21.75 65.889,23.203 65.889,24.016 72.226,30.353 77.953,30.353 84.702,37.103 84.702,41.351 80.702,41.351 80.702,39.351 75.667,34.315 69.52,34.315 60.9,25.696
  region net VBAT: 66.192,46.728 66.192,43.002 63.753,40.562 63.753,34.806 63.46,34.513 56.606,34.513 56.288,34.831 56.288,40.819 61.205,45.737 61.205,46.728
  region net NetC3_1: 63.398,55.22 63.983,55.804 66.421,55.804 66.987,55.238 66.987,51.66 67.187,51.46 67.822,51.46 68.022,51.66 68.022,56.887 67.174,57.734 63.525,57.734 62.542,56.751 62.542,53.67 63.398,53.67
  region net NetC19_2: 38.635,42.576 39.367,41.844 39.367,39.308 49.084,29.591 55.143,29.591 58.652,26.082 58.652,23.167 57.242,21.757 55.194,21.757 51.83,25.121 47.244,25.121 35.367,36.997 35.367,41.844 36.099,42.576
  region net NetC3_1: 67.056,57.734 70.51,57.734 79.702,48.542 79.702,40.833 78.988,40.119 76.416,40.119 75.717,40.818 75.717,49.073 71.323,53.467 69.596,55.194 68.021,55.194 67.056,56.159
  region net NetC3_1: 62.542,53.823 63.398,53.823 63.398,53.518 62.942,53.061 62.942,52.185 62.542,52.185
Bottom Layer:
  region net NetC7_1: 58.776,54.746 58.776,54.772 cw(c59.107,54.772) 59.107,55.102 60.859,55.102 cw(c60.859,54.746) 61.215,54.746 61.215,53.552 cw(c60.834,53.552) 60.834,53.171 59.132,53.171 cw(c59.132,53.552) 58.751,53.552
  region net NetC7_1: 63.992,54.746 63.992,54.772 cw(c64.322,54.772) 64.322,55.102 66.075,55.102 cw(c66.075,54.746) 66.431,54.746 66.431,53.552 cw(c66.05,53.552) 66.05,53.171 64.348,53.171 cw(c64.348,53.552) 63.967,53.552
  pour cut-out: 77.694,52.905 cw(c77.694,55.905) 74.694,55.905 cw(c77.694,55.905) 77.694,58.905 cw(c77.694,55.905) 80.694,55.905 cw(c77.694,55.905)
  pour cut-out: 49.694,52.905 cw(c49.694,55.905) 46.694,55.905 cw(c49.694,55.905) 49.694,58.905 cw(c49.694,55.905) 52.694,55.905 cw(c49.694,55.905)
  region net VBAT: 56.288,36.031 56.288,36.539 56.774,37.025 57.905,37.025 57.891,37.039 63.227,37.039 63.753,36.513 63.753,35.714 72.723,26.743 74.416,26.743 75.9,25.259 75.9,23.214 74.436,21.75 72.364,21.75 70.9,23.214 70.9,23.199 70.891,23.19 61.951,32.131 56.82,32.131 56.316,32.634
  region net NetC7_1: 64.694,55.093 57.252,55.093 48.235,46.076 44.247,46.076 40.367,42.196 40.367,40.808 41.099,40.076 43.635,40.076 44.367,40.808 44.367,41.326 46.272,43.231 49.428,43.231 59.369,53.171 64.757,53.171

## Silkscreen, mask and mechanical layers (free items; w line width, h text height)
Top Overlay:
  text "EN" at 1.554,64.726 h0.8
  text "GND" at 1.554,62.186 h0.8
  text "FAULT" at 1.474,58.399 h0.6
  text "CLIP" at 1.474,56.774 h0.6
  text "DACL" at 9.991,34.627 h0.8
  text "GND" at 13.788,34.627 h0.8